# EAGLE board 1Sheeld_Rev1 (EAGLE 6.3)
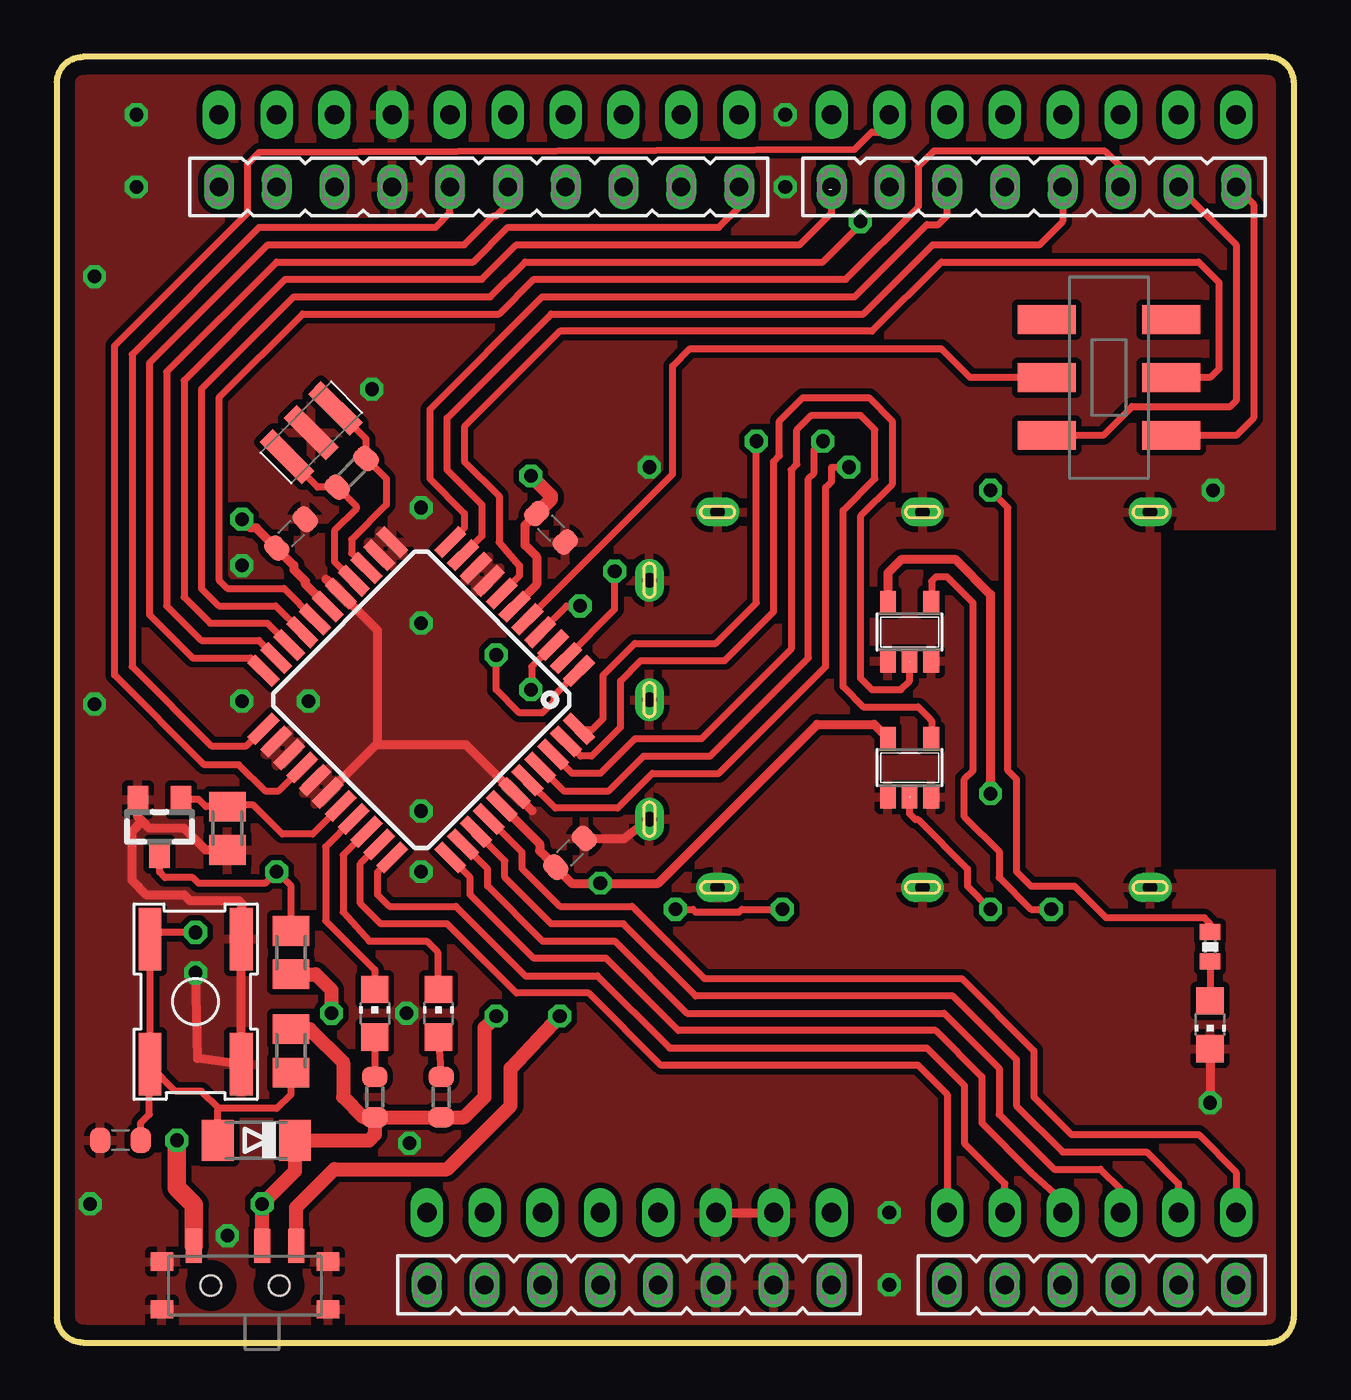
[diagram p0: board, top side]
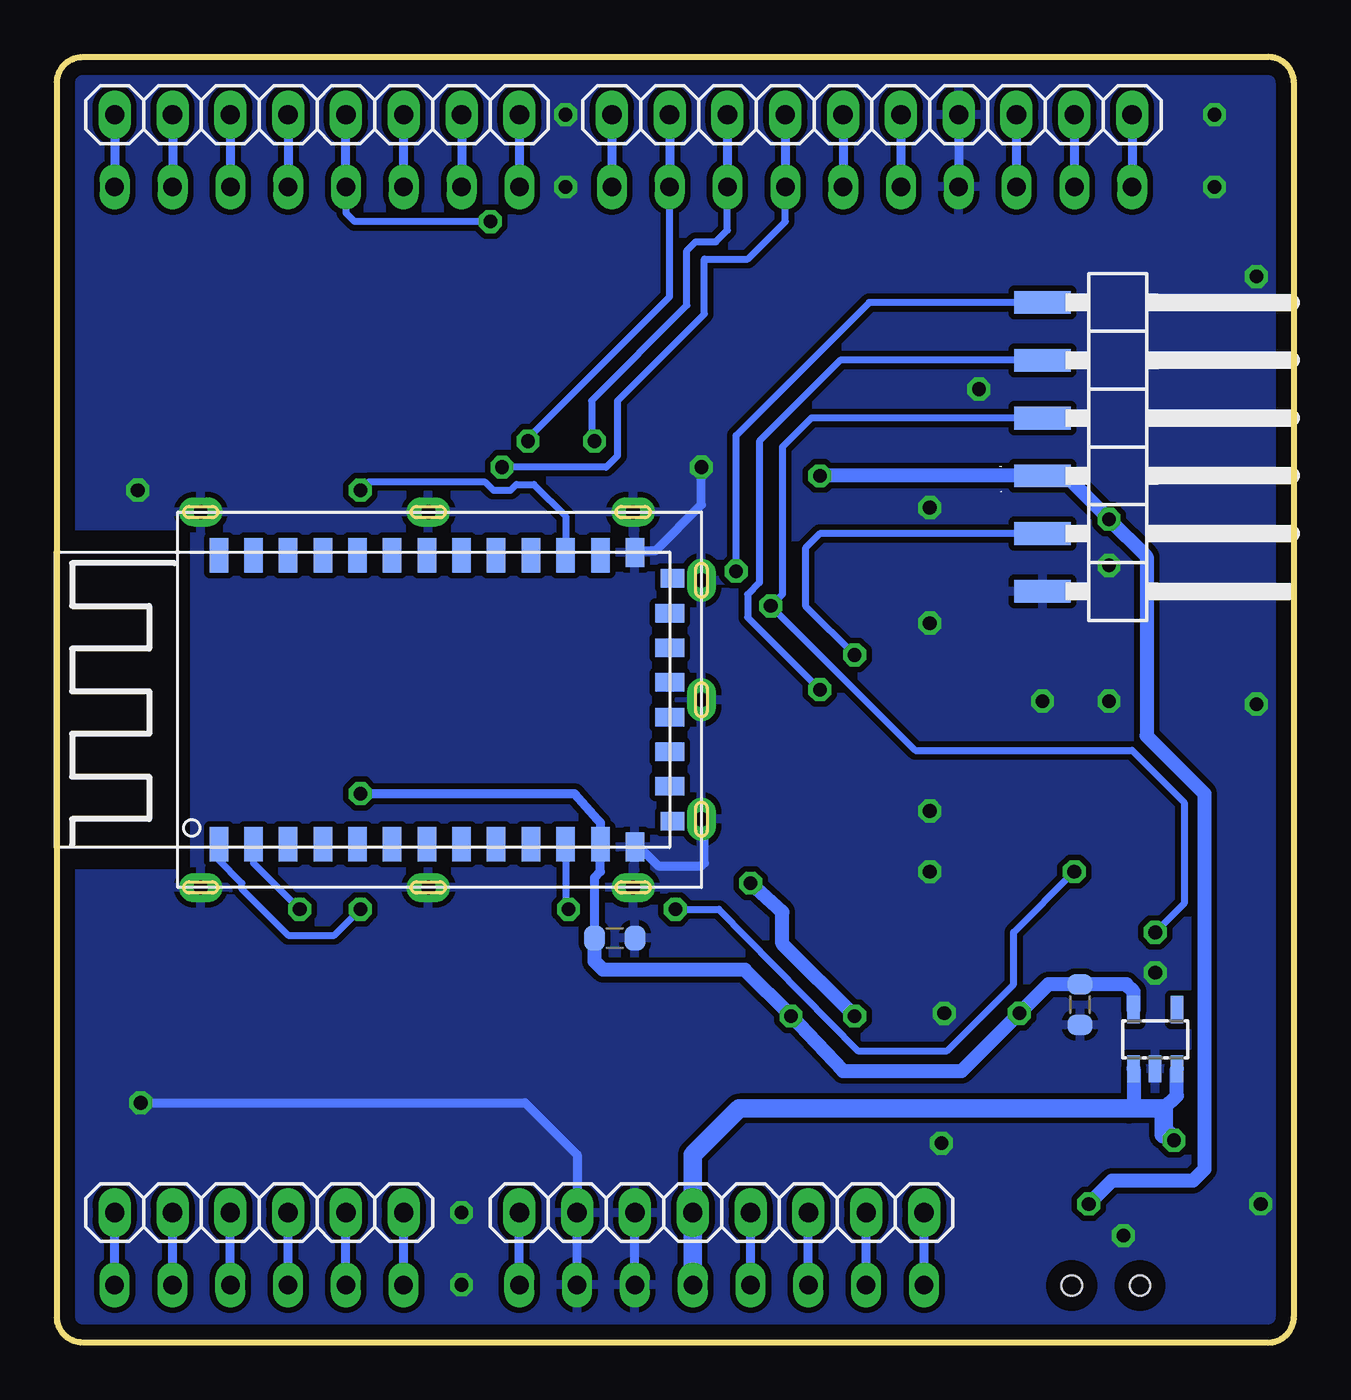
[diagram p1: board, bottom side, seen from below]

Size 54.36 x 56.52 mm. Coordinates in mm from the lower left corner, seen from the top.
Outline: 1.14,0 53.21,0 arc90 54.36,1.14 54.36,55.37 arc90 53.21,56.52 1.14,56.52 arc90 0,55.37 0,1.14 arc90 1.14,0
Copper layers (1*16): Top 0.035mm / dielectric 1.5mm / Bottom 0.035mm
Design rules "default *": minimum track width 10mil, minimum drill 24mil, track to track 8mil, track to pad 8mil, pad to pad 8mil, via to via 8mil, smd to smd 8mil, copper to edge 26mil, drill to drill 8mil, minimum pad ring 10mil, minimum via ring 8mil, stop-mask expansion 4mil, vias tented up to drill 31mil, thermal gap 10mil
Net classes: 0 default: width 0.254 mm, clearance 0.254 mm; 3 usbvcc: width 0.508 mm, drill 0.61 mm, clearance 0.254 mm
tRestrict: area 48.5,20.8 to 54.4,35.7
bRestrict: area 48.5,20.8 to 54.4,35.7

## Footprints (pad centres in the part's own frame; a part is rotated, then mirrored left to right if it is on the bottom)
1X06 = drill 0.85 pad 1.422 long: 1 -6.35,0; 2 -3.81,0; 3 -1.27,0; 4 1.27,0; 5 3.81,0; 6 6.35,0
FE06 = drill 0.813 long: 1 -6.35,0; 2 -3.81,0; 3 -1.27,0; 4 1.27,0; 5 3.81,0; 6 6.35,0
SERIAL_BLUETEETH = smd 1.524 x 0.813: 1 -6.35,19.812; 2 -6.35,18.288; 3 -6.35,16.764; 4 -6.35,15.24; 5 -6.35,13.716; 6 -6.35,12.192; 7 -6.35,10.668; 8 -6.35,9.144; 9 -6.35,7.62; 10 -6.35,6.096; 11 -6.35,4.572; 12 -6.35,3.048; 23 6.35,3.048; 24 6.35,4.572; 25 6.35,6.096; 26 6.35,7.62; 27 6.35,9.144; 28 6.35,10.668; 29 6.35,12.192; 30 6.35,13.716; 31 6.35,15.24; 32 6.35,16.764; 33 6.35,18.288; 34 6.35,19.812 | smd 1.27 x 0.813: 13 -6.477,1.524; 22 6.477,1.524 | smd 0.813 x 1.016: 14 -5.334,-0.127; 21 5.334,-0.127 | smd 0.813 x 1.27: 15 -3.81,0; 16 -2.286,0; 17 -0.762,0; 18 0.762,0; 19 2.286,0; 20 3.81,0
CHIP-LED0805 = smd 1.2 x 1.2: A 0,-1.05; C 0,1.05
C0603-ROUND = smd 0.898 x 1.1: 1 -0.889,0; 2 0.889,0
MINIMELF = smd 1.4 x 1.8: A 1.7,0; C -1.7,0
SOT23-5 = smd 0.69 x 0.99: 1 -0.95,-1.29; 2 0,-1.29; 3 0.95,-1.29; 4 0.95,1.3; 5 -0.95,1.3
1X06/90SMD = smd 1 x 2.5: 1 -6.35,-3.302; 2 -3.81,-3.302; 3 -1.27,-3.302; 4 1.27,-3.302; 5 3.81,-3.302; 6 6.35,-3.302
1X10 = drill 0.85 pad 1.422 long: 1 -11.43,0; 2 -8.89,0; 3 -6.35,0; 4 -3.81,0; 5 -1.27,0; 6 1.27,0; 7 3.81,0; 8 6.35,0; 9 8.89,0; 10 11.43,0
FE10 = drill 0.813 long: 1 -11.43,0; 2 -8.89,0; 3 -6.35,0; 4 -3.81,0; 5 -1.27,0; 6 1.27,0; 7 3.81,0; 8 6.35,0; 9 8.89,0; 10 11.43,0
1X08 = drill 0.85 pad 1.422 long: 1 -8.89,0; 2 -6.35,0; 3 -3.81,0; 4 -1.27,0; 5 1.27,0; 6 3.81,0; 7 6.35,0; 8 8.89,0
FE08 = drill 0.813 long: 1 -8.89,0; 2 -6.35,0; 3 -3.81,0; 4 -1.27,0; 5 1.27,0; 6 3.81,0; 7 6.35,0; 8 8.89,0
SWITCHMULTI = smd 0.7 x 1.5: 1 0.3,3.5; 2 3.3,3.5; 3 4.8,3.5 | smd 1 x 0.8: P$4 -1.1,2.8; P$5 -1.1,0.7; P$6 6.2,0.7; P$7 6.2,2.8 | hole 0.9: 1.05,1.75; 4.05,1.75
SOT23 = smd 0.9 x 1.2: 1 -0.95,-1.2; 2 0.95,-1.2; 3 0,1.2
M0805 = smd 1.3 x 1.6: 1 -0.95,0; 2 0.95,0
R0603-ROUND = smd 0.898 x 1.1: 1 -0.889,0; 2 0.889,0
0402-RES = smd 0.7 x 0.9: 1 -0.65,0; 2 0.65,0
OMRONSWITCH = smd 2.75 x 1: 1 2.75,-2; 2 -2.75,-2; 3 2.75,2; 4 -2.75,2
BT_SHIELD = drill 0.635 pad 1.27 long: S1 0,5.25; S2 0,0; S3 0,-5.25; S4 3,-8.25; S5 12,-8.25; S6 22,-8.25; S7 22,8.25; S8 12,8.25; S9 3,8.25
SOT23-DBV = smd 0.55 x 1.2: 1 -0.95,-1.3; 2 0,-1.3; 3 0.95,-1.3; 4 0.95,1.3; 5 -0.95,1.3
TQFP44 = smd 1.5 x 0.5: 1 -5.8,4; 2 -5.8,3.2; 3 -5.8,2.4; 4 -5.8,1.6; 5 -5.8,0.8; 6 -5.8,0; 7 -5.8,-0.8; 8 -5.8,-1.6; 9 -5.8,-2.4; 10 -5.8,-3.2; 11 -5.8,-4; 23 5.8,-4; 24 5.8,-3.2; 25 5.8,-2.4; 26 5.8,-1.6; 27 5.8,-0.8; 28 5.8,0; 29 5.8,0.8; 30 5.8,1.6; 31 5.8,2.4; 32 5.8,3.2; 33 5.8,4 | smd 0.5 x 1.5: 12 -4,-5.8; 13 -3.2,-5.8; 14 -2.4,-5.8; 15 -1.6,-5.8; 16 -0.8,-5.8; 17 0,-5.8; 18 0.8,-5.8; 19 1.6,-5.8; 20 2.4,-5.8; 21 3.2,-5.8; 22 4,-5.8; 34 4,5.8; 35 3.2,5.8; 36 2.4,5.8; 37 1.6,5.8; 38 0.8,5.8; 39 0,5.8; 40 -0.8,5.8; 41 -1.6,5.8; 42 -2.4,5.8; 43 -3.2,5.8; 44 -4,5.8
SWITCH = smd 1.27 x 2.54: 1 -2.413,-2.731; 2 0.127,-2.731; 3 2.667,-2.731; 4 -2.413,2.731; 5 0.127,2.731; 6 2.667,2.731
CSTCR6M = smd 0.8 x 2.6: 1 -1.5,0; 2 0,0; 3 1.5,0

## Placement (x,y rotation side)
AD  M06-1  [1X06]  45.47,5.71 180 bottom
AD1  FE06-1  [FE06]  45.47,2.54 0 top
BT-HC06  BLUETOOTH-SERIALSMD  [SERIAL_BLUETEETH]  27.43,28.26 90 bottom
BT-LED  BLUE  [CHIP-LED0805]  50.67,13.97 180 top
C1  100nF  [C0603-ROUND]  29.85,17.78 180 bottom
C2  100nF  [C0603-ROUND]  21.72,35.81 135 top
C3  100nF  [C0603-ROUND]  10.29,35.56 225 top
C4  100nF  [C0603-ROUND]  22.54,21.53 225 top
C5  1u  [C0603-ROUND]  9.4,14.86 90 bottom
C6  100nF  [C0603-ROUND]  2.79,8.89 0 top
D1  CD1206-S01575  [MINIMELF]  8.76,8.89 180 top
IC1  74LVC1G125DBV  [SOT23-5]  37.46,31.24 0 top
IC2  74LVC1G125DBV  [SOT23-5]  37.46,25.27 0 top
ICSP  PINHD-1X06SMD  [1X06/90SMD]  7.75,39.37 270 bottom
IOH  M10-1  [1X10]  18.54,53.98 0 bottom
IOH1  FE10-1  [FE10]  18.54,50.8 180 top
IOL  M08-1  [1X08]  42.93,53.98 0 bottom
IOL1  FE08-1  [FE08]  42.93,50.8 180 top
POWER  M08-1  [1X08]  25.15,5.71 180 bottom
POWER1  FE08-1  [FE08]  25.15,2.54 0 top
POWER-SWITCH  MULTICOMP - MSS3-V-T/R  [SWITCHMULTI]  5.71,0.76 0 top
Q1  TN0201K  [SOT23]  4.51,22.67 180 top
R1  4.7Kohm  [M0805]  7.49,22.61 90 top
R2  1Mohm  [R0603-ROUND]  12.95,38.23 45 top
R3  470ohm  [0402-RES]  50.67,17.4 90 top
R4  10Kohm  [M0805]  10.29,12.83 90 top
R7  10Kohm  [M0805]  10.29,17.14 270 top
R8  1Kohm  [R0603-ROUND]  16.89,10.79 270 top
R9  1Kohm  [R0603-ROUND]  13.97,10.79 270 top
RESET  SWITCHOMRON  [OMRONSWITCH]  6.1,14.99 90 top
RXD  YELLOW  [CHIP-LED0805]  16.76,14.48 0 top
S1  Metal shield  [BT_SHIELD]  26.04,28.26 180 bottom
TXD  GREEN  [CHIP-LED0805]  13.97,14.48 0 top
U1  LP2985-33DBVR  [SOT23-DBV]  6.1,13.34 0 bottom
U2  ATmega162  [TQFP44]  16.01,28.26 225 top
UART-SW  SWITCH  [SWITCH]  46.23,42.29 90 top
Y1  CSTCR7M37G53-R0 7.37MHZ  [CSTCR6M]  11.18,40.01 225 top

## Library data of the parts
AD C1-C6 IOH IOL POWER R2 R8 R9 U1 = SmartPrj
AD1 IOH1 IOL1 POWER1 = con-lsta; OC_FARNELL: unknown; OC_NEWARK: unknown
BT-HC06 S1 = Module
BT-LED RXD TXD = led
D1 = diode
IC1 IC2 = 74xx-little-de
ICSP = pinhead
POWER-SWITCH = switch; MANUFACTURER-PART: MSS3-V-T/R
Q1 = m-pad-2.1
R1 R4 R7 = rcl
R3 = SparkFun
RESET = omronsmd; MANUFACTURER-PART: B3SL-1022P
U2 = ATmega162
UART-SW = 1sheeld
Y1 = murata-filter

## Nets
+3.3V: BT-HC06.12 C1.2 C5.2 IC1.5 POWER-SWITCH.3 R7.2 U1.5
+5V: POWER1.5 POWER-SWITCH.1 POWER.5 U1.1 U1.3
ARDUINO/3.3V: POWER1.4 POWER.4
ARDUINO/RESET: POWER1.3 POWER.3
BT-LED: BT-HC06.24 R3.2
BT-RESET: BT-HC06.11 Q1.3 R7.1
GND: BT-HC06.13 BT-HC06.22 BT-LED.C C1.1 C2.1 C3.1 C4.1 C5.1 C6.1 IC1.1 IC1.3 IC2.1 IC2.3 ICSP.6 IOH1.7 IOH.7 POWER1.6 POWER1.7 POWER-SWITCH.P$4 POWER-SWITCH.P$5 POWER-SWITCH.P$6 POWER-SWITCH.P$7 POWER.6 POWER.7 Q1.2 R1.1 RESET.1 RESET.2 S1.S1 S1.S2 S1.S3 S1.S4 S1.S5 S1.S6 S1.S7 S1.S8 S1.S9 U1.2 U2.8 U2.9 U2.12 U2.13 U2.16 U2.24 U2.25 U2.27 U2.28 U2.39 Y1.2
IOREF: POWER1.2 POWER.2
N$1: IOH1.10 IOH.10
N$2: IOH1.9 IOH.9
N$3: BT-LED.A R3.1
N$34: IOH1.8 IOH.8
N$42: R9.1 TXD.A
N$47: R8.1 RXD.A
N/A: POWER1.1 POWER.1
PA0/A5: AD1.6 AD.6 U2.37
PA1/A4: AD1.5 AD.5 U2.36
PA2/A3: AD1.4 AD.4 U2.35
PA3/A2: AD1.3 AD.3 U2.34
PA4/A1: AD1.2 AD.2 U2.33
PA5/A0: AD1.1 AD.1 U2.32
PA6/LED-RXD: RXD.C U2.31
PA7/LED-TXD: TXD.C U2.30
PB0/11: IOH1.4 IOH.4 U2.40
PB1/9: IOH1.2 IOH.2 U2.41
PB2/RXD1: IC2.4 U2.42
PB3/TXD1: IC1.2 U2.43
PB4/SS/10: IOH1.3 IOH.3 U2.44
PB5/MOSI: ICSP.5 U2.1
PB6/MISO: ICSP.1 U2.2
PB7/SCK: ICSP.2 U2.3
PC0/2: IOL1.3 IOL.3 U2.18
PC1/4: IOL1.5 IOL.5 U2.19
PC2/7: IOL1.8 IOL.8 U2.20
PC3/8: IOH1.1 IOH.1 U2.21
PC4/12: IOH1.5 IOH.5 U2.22
PC5/13: IOH1.6 IOH.6 U2.23
PD0/RXD: U2.5 UART-SW.5
PD1/TXD: U2.7 UART-SW.2
PD4/3: IOL1.4 IOL.4 U2.10
PD5/5: IOL1.6 IOL.6 U2.11
PE0: Q1.1 R1.2 U2.29
PE2/6: IOL1.7 IOL.7 U2.26
RESET: C6.2 D1.A ICSP.3 R4.1 RESET.3 RESET.4 U2.4
RX/0: IOL1.1 IOL.1 UART-SW.1
TX/1: IOL1.2 IOL.2 UART-SW.4
UART-RX: BT-HC06.2 IC1.4
UART-TX: BT-HC06.1 IC2.2
VCC: C2.2 C3.2 C4.2 D1.C IC2.5 ICSP.4 POWER-SWITCH.2 R4.2 R8.2 R9.2 U2.6 U2.17 U2.38
VIN: POWER1.8 POWER.8
XTAL1: R2.1 U2.15 Y1.3
XTAL2: R2.2 U2.14 Y1.1

## Tracks (layer width: path | path; a pad name or v marks a point on that pad's centre or on a via)
+3.3V  (via drill 0.6)
  Top 0.406: 10.54,4.29 POWER-SWITCH.3 | v41.02,24.13 41.02,32.89 39.5,34.42 37.1,34.42 36.51,33.83 IC1.5
  Top 0.61: R7.2 11.36,16.2 12.06,15.49 v12.06,14.48 | POWER-SWITCH.3 10.51,5.94 12.19,7.62 17.14,7.62 19.94,10.41 19.94,12.06 v22.1,14.35
  Bottom 0.406: 30.48,21.46 BT-HC06.12 | v41.02,24.13 31.62,24.13 30.61,22.99 30.48,22.86 BT-HC06.12 | C1.2 30.73,20.45 30.48,20.7 BT-HC06.12
  Bottom 0.61: C1.2 30.73,16.76 30.35,16.38 24.13,16.38 v22.1,14.35 19.81,11.94 14.6,11.94 v12.06,14.48 10.79,15.75 C5.2 7.37,15.75 7.05,15.43 U1.5
+5V  (via drill 0.6)
  Top 0.813: POWER-SWITCH.1 6.02,6.05 5.27,6.79 v5.27,8.89
  Bottom 0.61: U1.3 5.15,10.86 5.71,10.29 | U1.1 7.05,10.35
  Bottom 0.813: POWER1.5 POWER.5 26.42,8.26 24.38,10.29 7.24,10.29 | 7.24,10.29 5.71,10.29 5.71,9.14 5.53,9.14 v5.27,8.89 | 7.05,10.35 7.24,10.29
ARDUINO/3.3V
  Bottom 0.406: POWER1.4 POWER.4
ARDUINO/RESET
  Bottom 0.406: POWER1.3 POWER.3
BT-LED  (via drill 0.6)
  Top 0.305: R3.2 50.67,18.41 50.42,18.67 46.1,18.67 44.7,20.07 42.8,20.07 42.16,20.7 42.16,24.77 41.78,25.15 41.78,36.7 v41.02,37.47
  Bottom 0.305: BT-HC06.24 32,36.32 33.4,37.72 34.16,37.72 34.42,37.47 35.18,37.47 35.56,37.85 40.64,37.85 v41.02,37.47
BT-RESET  (via drill 0.6)
  Top 0.305: R7.1 10.29,20.07 v9.65,20.7 9.14,20.19 6.22,20.19 5.97,20.45 4.75,20.45 4.51,20.69 Q1.3 | v27.18,19.05 27.94,19.05 28.07,18.92 29.97,18.92 30.1,19.05 v31.88,19.05
  Top 0.406: 4.45,21.41 Q1.3
  Bottom 0.305: BT-HC06.11 32,19.18 v31.88,19.05 | v27.18,19.05 25.27,19.05 19.18,12.83 15.24,12.83 12.32,15.75 12.32,18.03 v9.65,20.7
GND  (via drill 0.6)
  Top 0.305: 8.13,17.77 RESET.1 | 12.47,32.98 U2.16 12.05,33.34 12.05,33.4
  Top 0.406: POWER.6 POWER.7 | C3.1 10.93,36.06 | 14.1,26.29 17.97,26.29 U2.39 20.19,24.16 20.19,24.08 20.89,23.38 | 14.1,26.29 14.1,31.3 U2.16 | C4.1 24.93,22.16 S1.S1 | R1.1 6.54,21.66 5.59,22.61 4.06,22.61 3.75,22.92 | 3.75,22.92 3.56,23.11 Q1.2 | RESET.1 RESET.2 6.18,12.49 v6.1,16.26 | 3.75,22.92 3.3,22.48 3.3,20.32 3.94,19.68 5.59,19.68 5.84,19.43 8,19.43 8.13,19.3 8.13,17.77 | 12.05,33.4 11.99,33.4 11.83,33.56 | 12.02,24.21 12.02,24.27 14.04,26.29 14.1,26.29 | BT-LED.C v50.67,10.54
  Bottom 0.406: IOH.7 IOH1.7 | POWER1.7 POWER.7 31.5,8.26 33.78,10.54 v50.67,10.54 | POWER1.6 POWER.6 | BT-HC06.13 28.7,21.72 27.94,20.95 26.04,20.95 25.91,21.08 25.91,22.82 S1.S1 | v26.04,38.48 26.04,36.83 28.07,34.8 28.89,34.8 BT-HC06.22
  other vias: 13.84,41.91 32,53.98 32,50.8 36.58,2.54 3.49,53.98 3.49,50.8 8.13,28.19 36.58,5.71 1.46,6.1 16,20.7 7.49,4.7 15.49,8.76 8.13,34.16 16,36.7 11.05,28.19 16,23.37 16,31.62 1.65,46.86 1.65,28.07 50.8,37.47 15.37,14.48
  pour Top: 0,56.52 54.36,56.52 54.36,0 0,0
  pour Bottom: 54.36,0 0,0 0,56.52 54.36,56.52
IOREF
  Bottom 0.406: POWER1.2 POWER.2
N$1
  Bottom 0.406: IOH.10 IOH1.10
N$2
  Bottom 0.406: IOH.9 IOH1.9
N$3
  Top 0.305: R3.1 BT-LED.A
N$34
  Bottom 0.406: IOH.8 IOH1.8
N$42
  Top 0.305: TXD.A R9.1
N$47
  Top 0.305: RXD.A R8.1
N/A
  Bottom 0.406: POWER1.1 POWER.1
PA0/A5
  Top 0.305: AD.6 51.82,7.49 50.16,9.14 44.58,9.14 42.93,10.79 42.93,12.83 39.75,16 28.45,16 25.27,19.18 22.1,19.18 20.45,20.83 20.45,21.55 U2.37
  Bottom 0.406: AD1.6 AD.6
PA1/A4
  Top 0.305: AD.5 49.28,6.99 47.88,8.38 44.2,8.38 42.16,10.41 42.16,12.45 39.37,15.24 28.07,15.24 24.89,18.41 21.72,18.41 19.69,20.45 19.69,21.18 U2.36
  Bottom 0.406: AD1.5 AD.5
PA2/A3
  Top 0.305: AD.4 46.74,6.73 45.85,7.62 43.81,7.62 41.4,10.03 41.4,12.06 38.99,14.48 27.69,14.48 24.51,17.65 21.34,17.65 18.92,20.07 18.92,20.81 U2.35
  Bottom 0.406: AD1.4 AD.4
PA3/A2
  Top 0.305: U2.34 18.16,20.44 18.16,19.68 20.96,16.89 24.13,16.89 27.3,13.72 38.61,13.72 40.64,11.68 40.64,9.65 42.8,7.49 44.2,6.22 AD.3
  Bottom 0.406: AD1.3 AD.3
PA4/A1
  Top 0.305: U2.33 14.1,20.69 14.1,19.68 14.6,19.18 17.53,19.18 20.57,16.13 23.75,16.13 26.92,12.95 38.23,12.95 39.88,11.3 39.88,8.76 41.66,6.99 AD.2
  Bottom 0.406: AD1.2 AD.2
PA5/A0
  Top 0.305: AD.1 39.12,10.92 37.85,12.19 26.54,12.19 23.37,15.37 20.19,15.37 17.14,18.41 14.22,18.41 13.33,19.3 13.33,21.06 U2.32
  Bottom 0.406: AD1.1 AD.1
PA6/LED-RXD
  Top 0.305: 13.66,22.42 13.57,22.42 | 13.57,22.42 12.57,21.43 12.57,18.92 13.72,17.65 16.24,17.65 16.73,17.17 16.73,15.57 RXD.C | 13.57,22.42 U2.31
PA7/LED-TXD
  Top 0.305: TXD.C 13.97,16.38 11.81,18.54 11.81,21.8 13,22.99 U2.30
PB0/11  (via drill 0.6)
  Top 0.305: U2.40 21.9,23.5 24.64,23.5 26.16,25.02 29.08,25.02 33.78,29.72 33.78,37.59 34.04,37.85 34.04,38.48 v34.8,38.48
  Bottom 0.305: v34.8,38.48 30.23,38.48 29.72,38.99 29.72,41.4 25.91,45.21 25.91,47.62 24,47.62 22.35,49.28 IOH1.4
  Bottom 0.406: IOH.4 IOH1.4
PB1/9  (via drill 0.6)
  Top 0.305: U2.41 22.27,24.26 24.26,24.26 25.78,25.78 28.7,25.78 33.02,30.1 33.02,37.97 33.27,38.23 33.27,39.24 v33.65,39.62
  Bottom 0.305: IOH1.2 27.43,45.97 33.65,39.75 v33.65,39.62
  Bottom 0.406: IOH.2 IOH1.2
PB2/RXD1
  Top 0.305: U2.42 22.64,25.02 23.88,25.02 25.4,26.54 28.32,26.54 32.26,30.48 32.26,38.35 32.51,38.61 32.51,40.13 33.15,40.77 35.31,40.77 35.94,40.13 35.94,37.97 34.54,36.58 34.54,28.83 35.43,27.94 37.85,27.94 38.35,27.43 38.35,27.41 38.43,27.33 38.43,26.59 IC2.4
PB3/TXD1
  Top 0.305: U2.43 23.01,25.78 | 23.01,25.78 23.5,25.78 24.77,27.05 24.77,29.08 25.65,29.97 29.34,29.97 31.5,32.13 31.5,38.73 31.75,38.99 31.75,40.51 32.77,41.53 35.69,41.53 36.7,40.51 36.7,37.72 35.31,36.32 35.31,29.21 35.81,28.7 37.08,28.7 37.46,29.08 IC1.2 | 23.01,25.78
PB4/SS/10  (via drill 0.6)
  Top 0.305: v30.73,39.62 30.73,32.51 28.96,30.73 25.4,30.73 24,29.34 24,27.43 23.5,26.92 23,26.92 U2.44
  Bottom 0.305: IOH1.3 24.89,48.9 25.4,48.39 26.29,48.39 26.67,48.01 26.67,45.59 30.86,41.4 30.86,39.75 v30.73,39.62
  Bottom 0.406: IOH.3 IOH1.3
PB5/MOSI  (via drill 0.6)
  Top 0.305: v19.3,30.23 19.3,28.7 20.32,27.69 21.22,27.69 21.35,27.7 21.84,28.19 21.84,28.45 U2.1 | U2.1
  Bottom 0.305: v19.3,30.23 21.46,32.38 21.46,34.92 20.83,35.56 ICSP.5
PB6/MISO  (via drill 0.6)
  Top 0.305: v24.51,33.91 24.51,32.23 U2.2 22.48,30.1 22.48,30.21
  Bottom 0.305: v24.51,33.91 24.51,39.88 18.67,45.72 ICSP.1
PB7/SCK  (via drill 0.6)
  Top 0.305: U2.3 20.86,29.72 20.86,28.74 v20.83,28.7
  Bottom 0.305: v20.83,28.7 24,31.88 24,32.89 23.5,33.4 23.5,39.62 19.94,43.18 ICSP.2
PC0/2
  Top 0.305: IOL1.3 46.74,51.69 46.04,52.39 38.54,52.39 37.85,51.69 37.85,49.91 34.67,46.74 20.96,46.74 19.43,45.21 10.79,45.21 7.11,41.53 7.11,33.53 7.49,33.15 9.98,33.15 U2.18
  Bottom 0.406: IOL.3 IOL1.3
PC1/4  (via drill 0.6)
  Top 0.305: v35.31,49.28 35.31,49.15 33.65,47.5 20.57,47.5 19.05,45.97 10.41,45.97 6.35,41.91 6.35,33.15 7.11,32.38 9.61,32.38 U2.19
  Bottom 0.254: 41.66,53.34 IOL.5
  Bottom 0.305: IOL1.5 41.66,49.66 41.27,49.28 v35.31,49.28
  Bottom 0.406: IOL1.5 IOL.5
PC2/7
  Top 0.305: U2.20 9.24,31.62 6.73,31.62 5.59,32.77 5.59,42.29 10.03,46.74 18.67,46.74 20.19,48.26 32.64,48.26 34.04,49.66 IOL1.8
  Bottom 0.406: IOL.8 IOL1.8
PC3/8
  Top 0.305: IOH1.1 29.97,49.91 29.08,49.02 19.81,49.02 18.29,47.5 9.65,47.5 4.83,42.67 4.83,32.38 6.35,30.86 8.88,30.86 U2.21 9.77,30.1
  Bottom 0.406: IOH.1 IOH1.1
PC4/12
  Top 0.305: 19.81,50.04 19.3,49.53 19.18,49.53 17.91,48.26 9.27,48.26 4.06,43.05 4.06,32 5.97,30.1 8.51,30.1 U2.22 9.2,29.53
  Top 0.406: 19.81,50.04 IOH1.5
  Bottom 0.406: IOH.5 IOH1.5
PC5/13
  Top 0.305: IOH1.6 17.27,49.66 16.64,49.02 8.89,49.02 3.3,43.43 3.3,29.72 6.79,26.23 8.33,26.23 U2.23
  Bottom 0.406: IOH.6 IOH1.6
PD0/RXD
  Top 0.305: U2.5 27.05,38.17 27.05,42.93 27.81,43.69 38.86,43.69 40.13,42.42 UART-SW.5
  Top 0.406: U2.5 20.66,31.71
PD1/TXD
  Top 0.305: UART-SW.2 50.67,42.42 51.05,42.8 51.05,46.61 50.16,47.5 38.86,47.5 35.81,44.45 22.1,44.45 17.91,40.26 17.91,38.73 19.43,37.21 19.43,35.18 20.32,34.16 20.32,33.7 U2.7 | U2.7
  Top 0.406: 48.64,42.42 UART-SW.2
PD4/3
  Top 0.305: IOL1.4 44.2,49.28 43.18,48.26 38.48,48.26 35.43,45.21 21.72,45.21 17.14,40.64 17.14,38.35 18.67,36.83 18.67,35.44 U2.10 | U2.10
  Bottom 0.406: IOL.4 IOL1.4
PD5/5
  Top 0.305: IOL1.6 39.12,49.53 38.73,49.15 38.23,49.15 35.05,45.97 21.34,45.97 16.38,41.02 16.38,37.97 17.91,36.45 17.91,35.83 17.92,35.82 17.39,35.3 17.39,35.28
  Top 0.406: U2.11 17.39,35.28
  Bottom 0.406: IOL1.6 IOL.6
PE0
  Top 0.305: U2.29 11.23,22.35 9.91,22.35 8.64,23.62 7.49,23.62 | R1.2 6.54,23.56 6.22,23.88 Q1.1
  Top 0.406: 7.49,23.62 R1.2 | Q1.1
PE2/6
  Top 0.305: U2.26 9.75,24.26 9.14,24.26 8,25.4 6.48,25.4 2.54,29.34 2.54,43.81 8.38,49.66 8.38,51.82 8.89,52.32 35.05,52.45 35.81,53.21 36.58,53.21 IOL.7
  Bottom 0.305: 36.58,53.34 IOL.7
  Bottom 0.406: IOL.7 IOL1.7
RESET  (via drill 0.6)
  Top 0.254: 4.18,18.03 RESET.3
  Top 0.305: RESET.3 RESET.4 4.06,12.2 4.06,10.03 3.68,9.65 C6.2 | v22.99,32.38 22.4,32.38 U2.4 | 4.1,12.16 5.21,11.05 6.35,11.05 7.11,10.29 7.14,10.29 | v6.1,18.03 4.18,18.03 | R4.1 10.29,10.92 9.65,10.29 7.14,10.29 | 7.14,10.29 7.06,10.21 D1.A
  Top 0.406: RESET.4 4.1,12.16
  Bottom 0.305: v6.1,18.03 4.83,19.3 4.83,23.75 7.11,26.04 16.64,26.04 v22.99,32.38 22.48,32.89 22.48,39.37 21.21,40.64 ICSP.3
RX/0
  Top 0.305: IOL1.1 52.58,50.04 52.58,40.64 51.82,39.88 UART-SW.1
  Bottom 0.406: IOL.1 IOL1.1
TX/1
  Top 0.305: IOL1.2 51.82,48.26 51.82,41.4 51.56,41.15 47.24,41.15 45.97,39.88 UART-SW.4
  Bottom 0.406: IOL.2 IOL1.2
UART-RX  (via drill 0.6)
  Top 0.305: v43.69,19.05 42.8,19.05 41.4,20.45 41.4,21.59 39.88,23.11 39.88,24.77 40.26,25.15 40.26,32.51 39.12,33.66 38.62,33.66 38.43,33.47 38.43,32.56 IC1.4
  Bottom 0.305: BT-HC06.2 45.72,21.08 v43.69,19.05
UART-TX  (via drill 0.6)
  Top 0.305: v41.02,19.05 40,20.07 40,20.83 37.85,22.99 37.72,22.99 37.46,23.24 IC2.2
  Bottom 0.305: BT-HC06.1 47.24,21.21 46.23,20.19 46.23,19.94 44.2,17.91 42.16,17.91 v41.02,19.05
VCC  (via drill 0.6)
  Top 0.305: 19.66,23.48 19.66,23.57 19.56,23.57 U2.38 | 20.57,35.18 20.57,35.05 | U2.6
  Top 0.406: 20.57,35.18 20.57,35.93 C2.2 | 19.66,23.48 21.21,21.92 21.21,21.62 21.47,21.36 C4.2 22.62,20.19 v23.88,20.19 26.42,20.19 33.4,27.18 35.91,27.18 IC2.5 | U2.6 21.08,33.33 21.08,34.54 20.57,35.05 | U2.17 10.92,33.34 10.92,33.47 10.41,33.97 10.41,34.16 9.66,34.92 C3.2 9.65,34.93 8.76,35.81 8.51,35.81 v8.13,36.2
  Top 0.61: v19.3,14.35 18.8,13.84 18.8,10.79 17.91,9.91 R8.2 R9.2 | R9.2 13.97,9.14 13.72,8.89 D1.C 10.46,7.54 v9.02,6.1 v9.01,6.09 POWER-SWITCH.2 | 9.65,35.05 C3.2 | R9.2 13.46,9.91 12.57,10.79 12.57,12.32 11.12,13.78 R4.2 | v20.83,38.1 21.72,37.21 21.72,37.08 21.09,36.45 C2.2
  Bottom 0.305: 8.25,36.32 v8.13,36.2
  Bottom 0.61: v23.88,20.19 22.48,18.92 22.48,17.53 v19.3,14.35 | v9.02,6.1 8,7.11 4.45,7.11 3.94,7.62 3.94,24.13 6.48,26.67 6.48,34.54 v8.13,36.2 | 8.25,36.32 10.03,38.1 ICSP.4 v20.83,38.1
VIN
  Bottom 0.406: POWER1.8 POWER.8
XTAL1
  Top 0.305: Y1.3 11.46,37.6 R2.1 13.14,36.78 13.14,36.64 12.19,35.69 12.19,34.33 U2.15
XTAL2
  Top 0.305: R2.2 13.58,39.72 Y1.1 | U2.14 12.95,34.7 12.95,35.31 14.48,36.83 14.48,37.97 13.71,38.74 13.71,38.76
  Top 0.406: R2.2 13.71,38.76

## Text on the board
Top: This reference design is provided for reference only. | The information in this document is subject to change without notice. / / INTEGREIGHT, Inc. assume no liability whatsoever for results obtained or loss or damage incurred as a result of application of any data or information presented in this design. / / INTEGREIGHT, Inc. shall not be responsible for the risks associated with referencing or using the reference design. / / This design and its contents may contain errors, faults and inaccuracies, and may not be complete or current. | 1Sheeld A PRODUCT BY INTEGREIGHT, Inc.
Reference: GND | 13 | 12 | 11 | 10 | 9 | 8 | 7 | 6 | 5 | 4 | 3 | 2 | 1 | 0 | 3.3V | 5V | GND | GND | Vin | A5 | A4 | A3 | A2 | A1 | A0 | For More Information visit: / www.1Sheeld.com